# EAGLE board C2B (EAGLE 6.2)
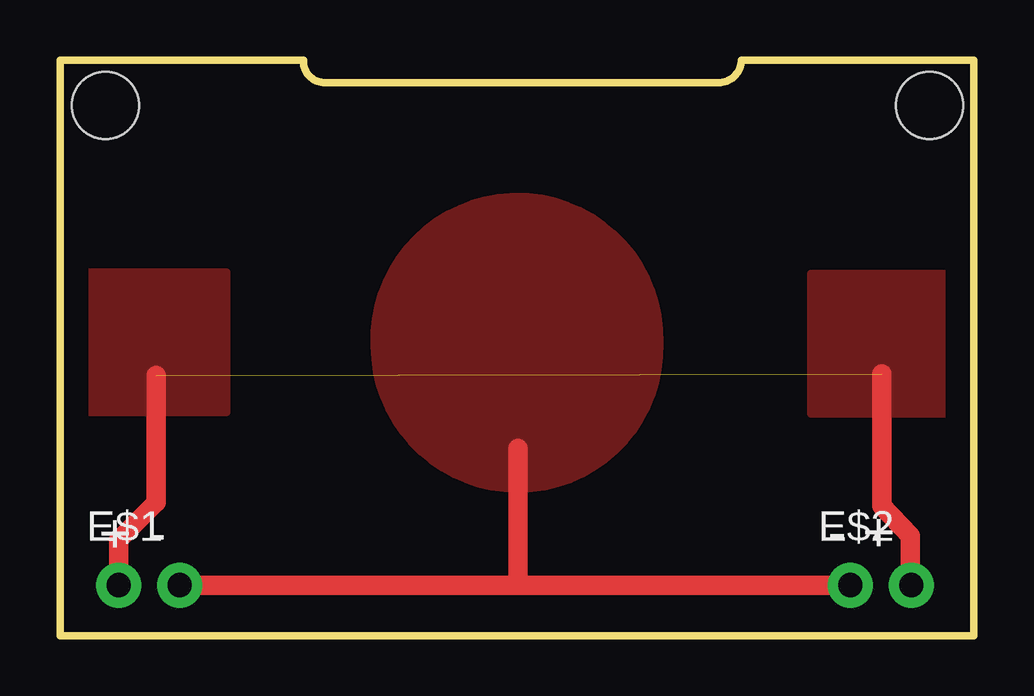
[diagram p0: board, top side]
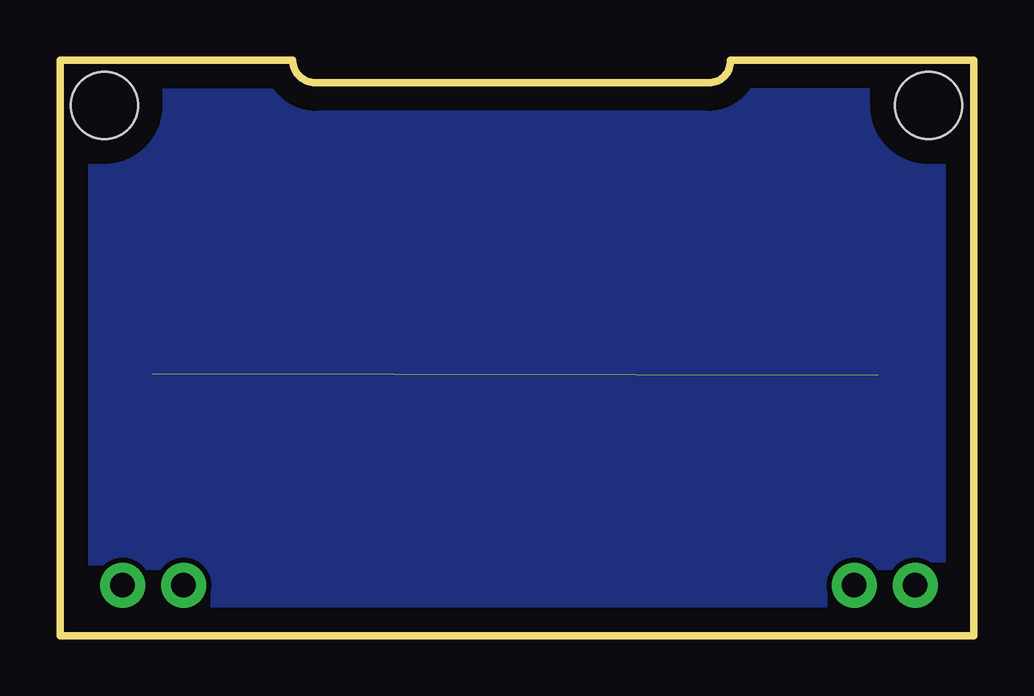
[diagram p1: board, bottom side, seen from below]

Size 38.1 x 24 mm. Coordinates in mm from the lower left corner, seen from the top.
Outline: 0,24 0,0 38.1,0 38.1,24 28.4,24 arc-90 27.45,23.05 11.05,23.05 arc-90 10.15,23.95 10.15,24 0.05,24
Copper layers (1*16): Top 0.035mm / dielectric 1.5mm / Bottom 0.035mm
Design rules: minimum track width 10mil, minimum drill 24mil, track to track 8mil, track to pad 8mil, pad to pad 8mil, via to via 8mil, smd to smd 8mil, copper to edge 40mil, drill to drill 8mil, minimum pad ring 10mil, minimum via ring 8mil, stop-mask expansion 4mil, vias tented up to drill 0mil, thermal gap 10mil
Holes 2.8 mm at 1.9,22.1 36.25,22.1

## Footprints (pad centres in the part's own frame; a part is rotated, then mirrored left to right if it is on the bottom)
1X02_NO_SILK = drill 1.016 pad 1.88: 1 0,0; 2 2.54,0

## Placement (x,y rotation side)
E$1  [1X02_NO_SILK]  2.45,2.1 0 top
E$2  [1X02_NO_SILK]  32.95,2.1 0 top

## Library data of the parts
E$1 E$2 = SparkFun

## Nets
GND: E$1.2 E$2.1
VDD: E$1.1

## Tracks (layer width: path | path; a pad name or v marks a point on that pad's centre or on a via)
FLL
  pour Bottom: 0.4,0.45 0.4,23.45 37.6,23.45 37.6,0.55 0.45,0.55
GND
  Top 0.305: 19.05,7.85 19.1,7.8
  Top 0.813: E$1.2 19.1,2.1 | 19.1,2.1 E$2.1 | 19.1,7.8 19.1,2.1
  pour Top: 18.8,18.3 arc90 13.1,12.1 arc90 19.1,6.1 arc92 25,12.2 arc88 19.5,18.3 arc1
VDD  (1 unrouted)
  Top 0.813: 4,10.85 4,5.55 2.45,4 E$1.1 | 34.25,10.9 34.25,5.4 35.45,4.15 35.45,2.15
  pour Top: 1.15,15.15 6.95,15.15 6.95,9.3 1.2,9.3
  pour Top: 31.3,15.1 37.05,15.1 37.05,9.25 31.3,9.25

## Text on the board
tPlace: - + | + -